# Altium PCB 555手风琴.PcbDoc
Units mil, origin at the board's own origin, x right, y up, seen from the top; angles counter-clockwise.
Board outline 9000 x 4000 mil, 2 copper layers (Top Layer, Bottom Layer); 47 components, 23 nets, 108 pads, 130 vias.
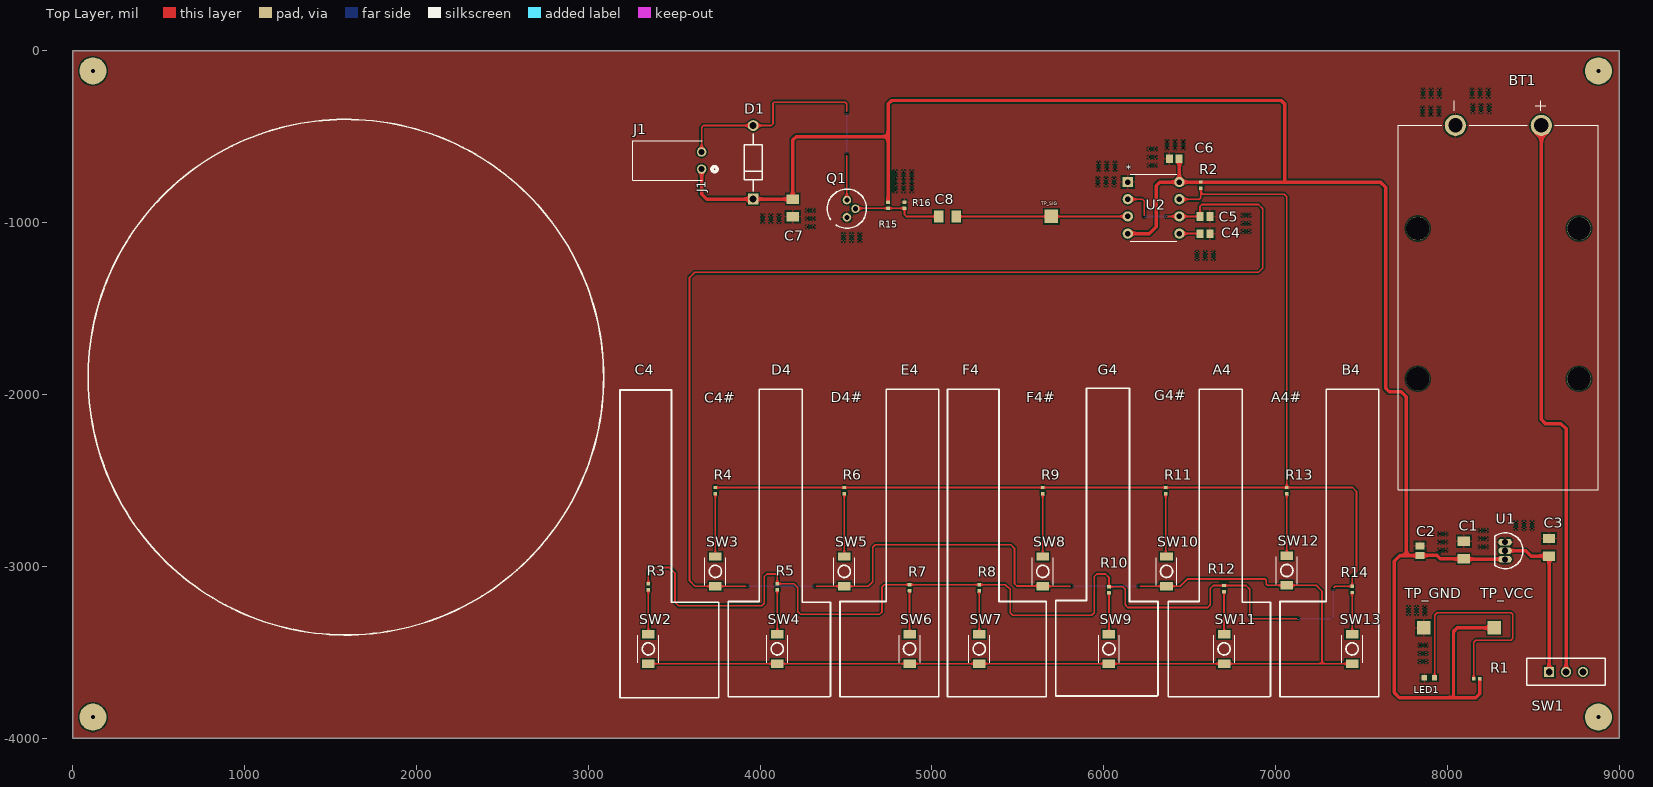
[diagram p0: Top Layer view]
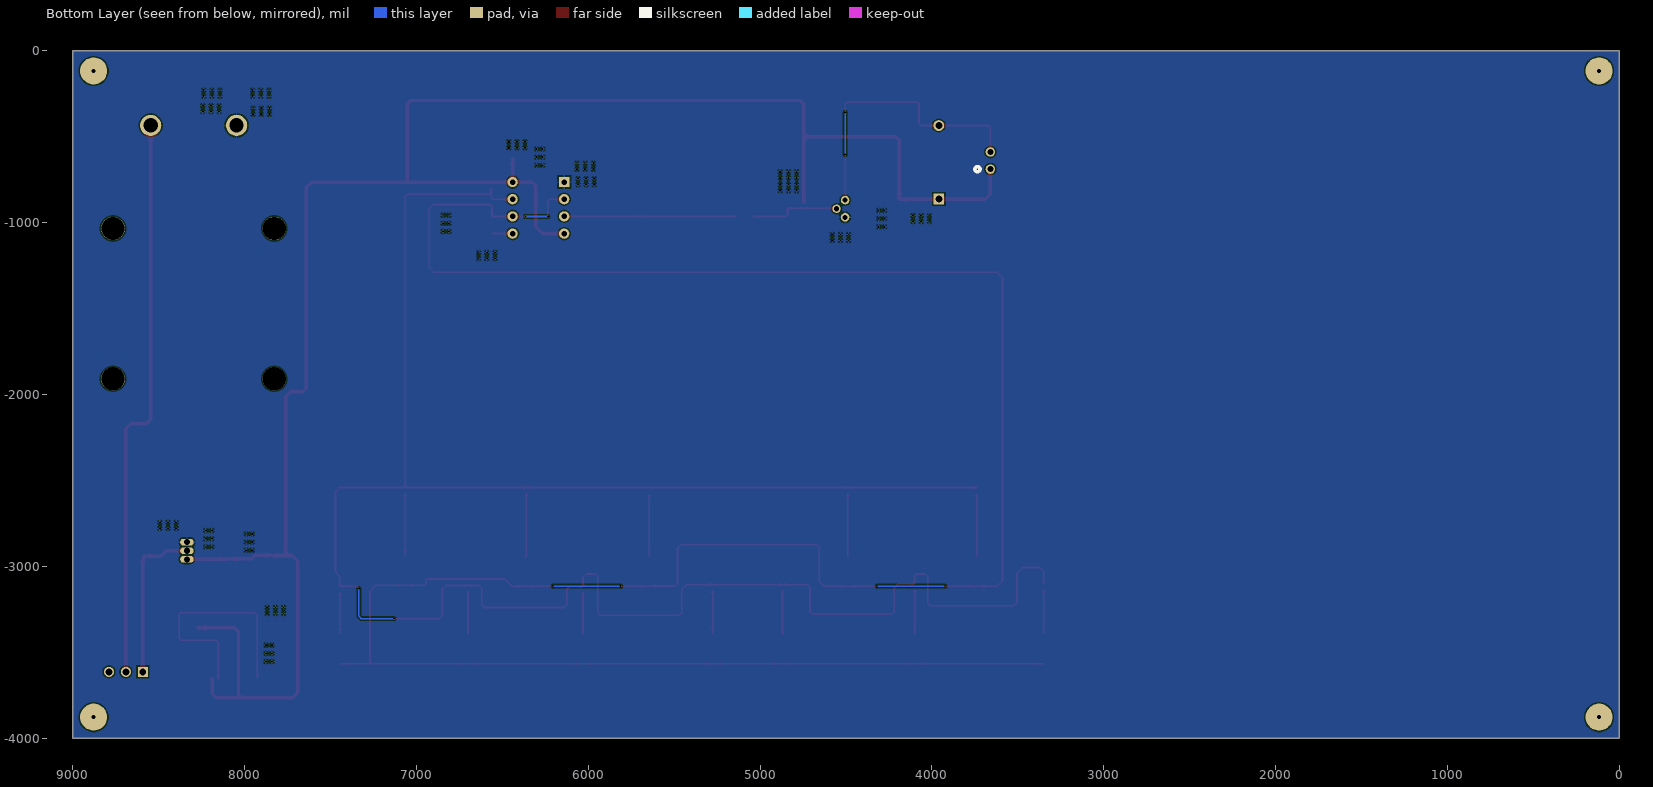
[diagram p1: Bottom Layer view, seen from below]
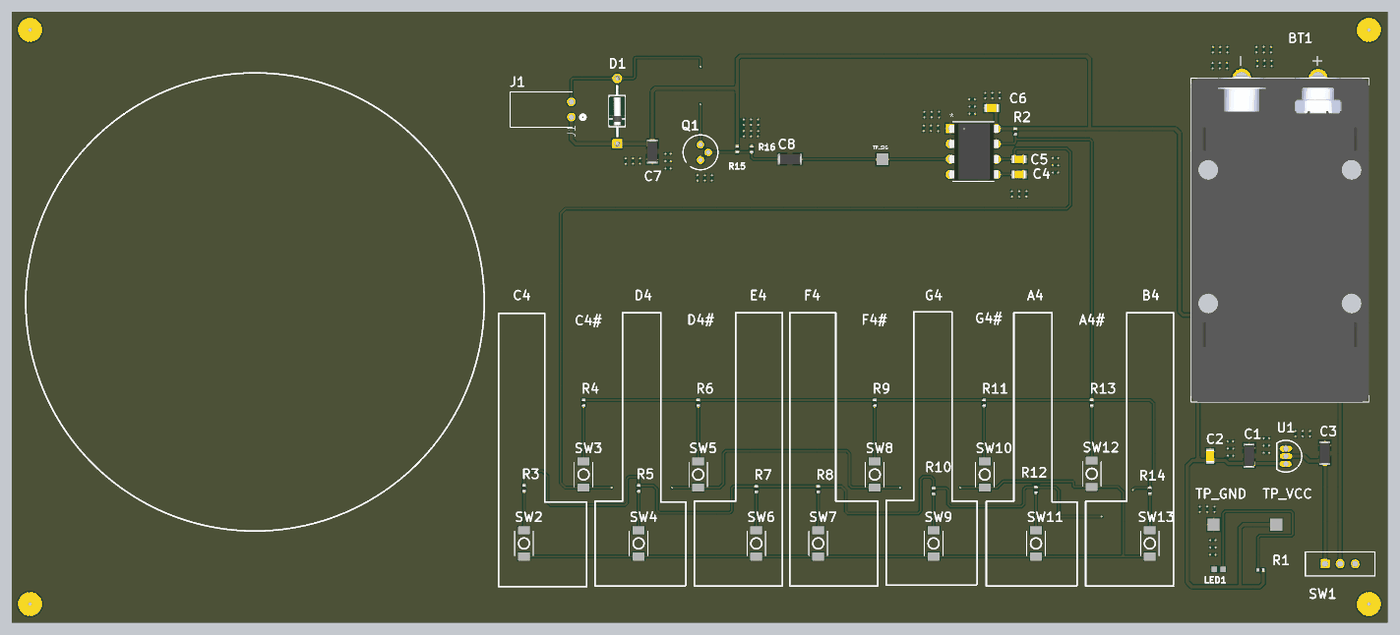
[diagram p2: 3D render of the assembled board from above, using the file's embedded part models]

## Layer stack, top to bottom
Top Solder: solder mask 0.4, Solder Resist, Dk 3.5
Top Layer: signal copper 1.4
Dielectric 1: dielectric 12.6, FR-4, Dk 4.8
Bottom Layer: signal copper 1.4
Bottom Solder: solder mask 0.4, Solder Resist, Dk 3.5

## Board outline
0,-4000 0,0 9000,0 9000,-4000

## Design rules (kind name [scope] priority, off if disabled: settings)
Clearance Via_to_Trace_Clearance [All] p1: gap=8 ignorepadtopadclearanceinfootprint=FALSE
Clearance Clearance_1 [All] p2: gap=10 ignorepadtopadclearanceinfootprint=FALSE
HoleSize [All] p1: absolutevalues=TRUE maxlimit=150 minlimit=2 maxpercent=80.000 minpercent=20.000
MinimumSolderMaskSliver [All] p1: minsoldermaskwidth=8
PolygonConnect [All] p1: connectstyle=Relief reliefconductorwidth=10 reliefentries=4 polygonreliefangle="90 Angle" airgapwidth=10
RoutingVias Signal_Via [All] p1: holewidth=10 width=20 viastyle="Through Hole" minholewidth=10 minwidth=20 maxholewidth=10 maxwidth=20
RoutingVias Power_Via [All] p2: holewidth=16 width=32 viastyle="Through Hole" minholewidth=16 minwidth=32 maxholewidth=16 maxwidth=32
RoutingVias [All] p3: holewidth=28 width=50 viastyle="Through Hole" minholewidth=28 minwidth=50 maxholewidth=28 maxwidth=50
SilkToSilkClearance [All] p1: silktosilkclearance=8
SilkToSolderMaskClearance [IsPad] p1: minsilkscreentomaskgap=5 clearancetoexposedcopper=TRUE
SolderMaskExpansion [All] p1: expansion=2 istentingtop=FALSE soldermaskfromhole=TRUE
SupplyNets "Schematic Supply Nets_3" [InNet('GND')] p1: voltage=0.000
SupplyNets "Schematic Supply Nets_2" [InNet('VCC')] p2: voltage=0.000
SupplyNets "Schematic Supply Nets_1" [InNet('VBAT')] p3: voltage=0.000
SupplyNets "Schematic Supply Nets" [InNet('VBAT_SW')] p4: voltage=0.000
Width [All] p1: maxlimit=20 minlimit=10 preferedwidth=10
26 further rules are at their usual default settings.

## Components (designator, comment, footprint, x,y, rotation, side; value= is the part's Value field where it differs from the comment)
BT1 "1294" BAT_1294 8295.91,-1494.84 r270 top
C1 "TAJA106K016RNJ" CAPMP3217X18-T_V 8095,-2906.18 r90 top value=10µF
C2 "Capacitor 100 nF +/-10% 50 V 0805" CAPC2013X95X50LL10T25 7840,-2910 r90 top value=0.01uF
C3 "TAJA106K016RNJ" CAPMP3217X18-T_V 8590,-2890 r90 top value=22-100µF
C4 "Capacitor 100 nF +/-10% 50 V 0805" CAPC2013X95X50LL10T25 6588.54,-1065 r0 top value=0.01uF
C5 "Capacitor 100 nF +/-10% 50 V 0805" CAPC2013X95X50LL10T25 6588.54,-965 r0 top value=0.01uF
C6 "Capacitor 100 nF +/-10% 50 V 0805" CAPC2013X95X50LL10T25 6410,-629.59 r180 top value=0.01uF
C7 "TAJA106K016RNJ" CAPMP3217X18-T_V 4190,-914.59 r270 top value=100-220µF
C8 "TAJA106K016RNJ" CAPMP3217X18-T_V 5090,-965 r180 top value=100µF
D1 "1N4001-E3/73" FP-1N4001-E3-73-MFG 3960,-650 r90 top value=15pF
J1 "TSW-102-22-L-S-RA" CON2_1X2_TR_TSW_SAI 3660,-639.59 r90 top
LED1 "FC-DA1608HRK-620D" LED0603-RD_RED 7895,-3650 r0 top
Q1 "2N2222A" STM-TO-18-3 4505,-920 r90 top
R1 "100R2F" RESC0402(1005)_L 8170,-3655 r180 top value=330
R2 "100R2F" RESC0402(1005)_L 6565,-782.28 r270 top value=1.4k
R3 "100R2F" RESC0402(1005)_L 3350,-3120 r270 top value=27.0k
R4 "100R2F" RESC0402(1005)_L 3740,-2560 r270 top value=25.5k
R5 "100R2F" RESC0402(1005)_L 4100,-3120 r270 top value=24.0k
R6 "100R2F" RESC0402(1005)_L 4490,-2560 r270 top value=22.1k
R7 "100R2F" RESC0402(1005)_L 4870,-3125 r270 top value=21.0k
R8 "100R2F" RESC0402(1005)_L 5275,-3125 r270 top value=20.0k
R9 "100R2F" RESC0402(1005)_L 5645,-2560 r270 top value=18.7k
R10 "100R2F" RESC0402(1005)_L 6030,-3137.28 r270 top value=17.8k
R11 "100R2F" RESC0402(1005)_L 6360,-2560 r270 top value=16.5k
R12 "100R2F" RESC0402(1005)_L 6700,-3130 r270 top value=16.0k
R13 "100R2F" RESC0402(1005)_L 7065,-2560 r270 top value=15.0k
R14 "100R2F" RESC0402(1005)_L 7445,-3135 r270 top value=14.0k
R15 "100R2F" RESC0402(1005)_L 4745,-899.59 r270 top value=10k
R16 "100R2F" RESC0402(1005)_L 4840,-899.59 r90 top value=1k
SW1 "EG1218" ESWI-EG1218_V 8690,-3615 r0 top
SW2 "TS-1088-AR02016" SW-SMD_L3.9-W3.0-P4.45 3350,-3481.02 r270 top
SW3 "TS-1088-AR02016" SW-SMD_L3.9-W3.0-P4.45 3740,-3030 r270 top
SW4 "TS-1088-AR02016" SW-SMD_L3.9-W3.0-P4.45 4100,-3481.02 r270 top
SW5 "TS-1088-AR02016" SW-SMD_L3.9-W3.0-P4.45 4490,-3030 r270 top
SW6 "TS-1088-AR02016" SW-SMD_L3.9-W3.0-P4.45 4870,-3481.02 r270 top
SW7 "TS-1088-AR02016" SW-SMD_L3.9-W3.0-P4.45 5275,-3481.02 r270 top
SW8 "TS-1088-AR02016" SW-SMD_L3.9-W3.0-P4.45 5645,-3030 r270 top
SW9 "TS-1088-AR02016" SW-SMD_L3.9-W3.0-P4.45 6030,-3481.02 r270 top
SW10 "TS-1088-AR02016" SW-SMD_L3.9-W3.0-P4.45 6365,-3030 r270 top
SW11 "TS-1088-AR02016" SW-SMD_L3.9-W3.0-P4.45 6700,-3481.02 r270 top
SW12 "TS-1088-AR02016" SW-SMD_L3.9-W3.0-P4.45 7065,-3025 r270 top
SW13 "TS-1088-AR02016" SW-SMD_L3.9-W3.0-P4.45 7445,-3481.02 r270 top
TP_GND "Component_1" PCBComponent_1 7895,-3295 r90 top
TP_SIG "Component_1" PCBComponent_1 5727.93,-901.41 r90 top
TP_VCC "Component_1" PCBComponent_1 8305,-3295 r90 top
U1 "MCP1702-5002E/TO" TO-92-TO3 8335,-2910 r180 top
U2 "LMC555CN/NOPB" N08E_TEX 6140,-764.59 r0 top

## Footprints (in the part's own frame and the unit in brackets; to place one, negate y for a bottom-side part, rotate by r counter-clockwise, add the part's x,y. Pads: shape width x height; smd on the part's side, far side on the other; paste and mask are expansions set on the pad)
BAT_1294 [mm]
  round 3.126 hole 2.11: N(-26.925,-6.35) P(-26.925,6.35)
  round 3.45 hole 3.45 unplated: ""(-11.685,11.915) ""(-11.685,-11.915) ""(10.545,11.915) ""(10.545,-11.915)
  silkscreen extent -30.56,-14.78 26.93,14.78, body extent -27.23,-14.78 26.92,14.78, height 20.32
CAPC2013X95X50LL10T25 [mm] "Chip Capacitor, 2-Leads, Body 2.10x1.35mm, IPC High Density"
  rect 1.05x1.3 smd: 1(-0.725,0) 2(0.725,0)
  body extent -1.05,-0.67 1.05,0.67, height 0.95
CAPMP3217X18-T_V [mm] "Molded Capacitor, 2-Leads, Body 3.40x1.8mm"
  rect 1.4x1.8 smd: 1(-1.3,0) 2(1.3,0)
  body extent -1.92,-0.9 1.92,0.9, height 1.8
CON2_1X2_TR_TSW_SAI [mil]
  round 55 hole 35 paste-99999 mask+0: 1(-50,0) 2(50,0)
  silkscreen extent -115,-90 115,400
ESWI-EG1218_V [mm] "THD, 3-Leads, Body 11.6x4mm, Pitch 2.5mm"
  rect 1.5x1.5 hole 1: 1(-2.5,0)
  round 1.5 hole 1: 2(0,0) 3(2.5,0)
  silkscreen extent -5.8,-2 5.8,2, body extent -5.8,-2 5.8,2, height 7.4
FP-1N4001-E3-73-MFG [mm]
  rect 1.6x1.6 hole 1.05 paste-2539.97 mask+0: 1(-5.438,0)
  round 1.6 hole 1.05 paste-2539.97 mask+0: 2(5.438,0)
  silkscreen extent -4.24,-1.35 4.24,1.35, body extent -6.34,-1.45 6.34,1.45, height 0.25
LED0603-RD_RED [mm]
  rect 0.8x0.8 smd paste+0.051: 1(-0.749,-0.003) 2(0.749,0.003)
N08E_TEX [mil]
  rect 60x60 / inner round 60 / far side rect 60x60 hole 32 paste-99999 mask+0: 1(0,0)
  round 60 hole 32 paste-99999 mask+0: 2(0,-100) 3(0,-200) 4(0,-300) 5(300,-300) 6(300,-200) 7(300,-100) 8(300,0)
  silkscreen extent 15,-345 285,45, body extent -5,-340 315,40, height 215
PCBComponent_1 [mm]
  rect 2x2 smd: 1(-1.615,0.836)
RESC0402(1005)_L [mm] "Chip Resistor, Body 1.0x0.5mm, IPC High Density"
  rrect25% 0.5x0.55 smd: 1(-0.45,0) 2(0.45,0)
  body extent -0.5,-0.25 0.5,0.25, height 0.3
STM-TO-18-3 [mm] "TO, 3-Leads, Diameter 5.8mm"
  round 1.25 hole 0.75: 1(0,-1.27) 2(1.27,0) 3(-1.27,0)
  silkscreen extent -2.9,-2.9 2.9,2.9, body extent -3.23,-2.9 2.9,3.23, height 5.3
SW-SMD_L3.9-W3.0-P4.45 [mm]
  rect 1.23x1.86 smd paste+0.051: 1(-2.185,0) 2(2.185,0)
  silkscreen extent -2.03,-1.54 2.03,1.54
TO-92-TO3 [mm] "TO, Flat Index; 3 In-Line, Axial Leads; Body Dia. 4.8mm; Leads 0.56 x 0.53 mm (max)"
  oval 2x1 hole 0.9: 1(0,-1.27) 2(0,0) 3(0,1.27)
  silkscreen extent -2.65,-2.65 1.52,2.65, body extent -2.65,-2.66 1.52,2.66, height 5.33

## Part data
BT1: "9 Volt Battery Holder- PC Terminals", Package="NON STANDARD-6 Keystone", Check_prices=https://www.snapeda.com/parts/1294/Keystone/view-part/?ref=eda, MF="Keystone Electronics", MP=1294, SnapEDA_Link=https://www.snapeda.com/parts/1294/Keystone/view-part/?ref=snap
C1 C3 C7 C8: library part CMP-001-00041-7, "Standard Tantalum, 10 uF, +/- 10%, 16 V, -55 to 125 degC, 1206 (3216 Metric), RoHS, Tape and Reel", Capacitor Type=Tantalum, Case/Package=1206, Manufacturer=AVX, Max Operating Temperature=125°C, Min Operating Temperature=-55°C, Package Description="2-Pin Surface Mount Device, Body 3.2 x 1.65 mm", Package Quantity=1, Package Reference=CAPMP3217X18-T, Tolerance=10%, Voltage Rating=16V, Datasheet URL=http://datasheets.avx.com/TAJ.pdf, Datasheet Version=Feb-16, ESR=3Ohm, Manufacturer URL=http://www.avx.com/, Mounting Technology=SM, Package URL=http://www.avx.com/download/software/literature/AVX-Footprint-Library.pdf, Packaging=TapeandReel, Pins=2, RoHS Compliant=True
C2 C4 C5 C6: library part CMP-001-00018-6, "Chip Capacitor, 100 nF, +/- 10%, 50 V, 0805 (2012 Metric)", Capacitor Type=Ceramic, Case/Package=0805, Max Operating Temperature=125°C, Min Operating Temperature=-55°C, Tolerance=10%, Voltage Rating=50V, Mounting Technology=SM, Pins=2, RoHS Compliant=True
D1: library part CMP-02540-000001-1, "DIODE GEN PURP 50V 1A DO204AL", Capacitance=15pF, Forward Current=1A, Manufacturer=Vishay, Max Junction Temp=+150°C, Max Repetitive Reverse Voltage=50V, Max Surge Forward Current=30A, Peak Reverse Current=5uA, Temperature="-50°C to +150°C", Temperature Range Low=-50°C, Automotive=No, Category=Diode, ComponentLink2Description=Datasheet, ComponentLink2URL=http://www.vishay.com/docs/88503/1n4001.pdf, Device Class L1="Discrete Semiconductors", Device Class L2=Diodes, Device Class L3="Rectifier Diodes", Digikey Description="DIODE GEN PURP 50V 1A DO204AL", Height=2.7mm, Ipc Land Pattern Name=DIOPA1088W105L520D270, Lead Free=Yes, Manufacturer Part Number=1N4001-E3/73, Mouser Description="Rectifiers Vr/50V Io/1A", Octopart=https://octopart.com/1n4001-e3%2F73-vishay-42330130, Package=1N4001-E3/73, Reverse Voltage=50V, RoHS=TRUE, Temperature Range High=+150°C
J1: "No Description Available", Manufacturer_Name="Samtec Inc", Copyright="Copyright (C) 2026 Ultra Librarian. All rights reserved.", Manufacturer_Part_Number=TSW-102-22-L-S-RA, RefDes=RefDes, Type=Type
Q1: library part CMP-2000-05381-1, "High Speed Switch, 0.6 A IC, -65 to 175 degC, 3-Pin TO-18, RoHS, Bulk", Collector Emitter Voltage V(br)ceo=40V, DC Collector Current=600mA, DC Current Gain hFE=300hFE, Manufacturer=STMicroelectronics, Operating Temperature Max=175degC, Package Description="3-Pin Through Hole Device, Dia 5.8 mm, Pitch 1.27 mm", Package Reference=TO-18-3, Power Dissipation Pd=500mW, Transistor Case Style=TO-18, Transition Frequency ft=300MHz, Automotive Qualification Standard=-, Datasheet URL=https://datasheet.ciiva.com/25917/cd00003223-25917094.pdf, Datasheet Version=Feb-03, Manufacturer URL=http://www.st.com/, No. of Pins=3Pins, Product Range=-, Transistor Polarity=NPN
R1 R2 R3 R4 R5 R6 R7 R8 R9 R10 R11 R12 R13 R14 R15 R16: library part CMP-009-00065-2, "100R 0.063W 1% 0402 (1005 Metric)  SMD", Case/Package=0402, Power=63mW, Tolerance=1%, Mounting Technology=SMT, Pins=2
SW1: library part CMP-1696-00002-1, "Slide Switch, 500 V, -20 to 70 degC, 3-Pin THD, RoHS", Case\Package=SOT-23-5, Dropout Voltage="300 mV", Max Input Voltage="8 V", Max Operating Temperature="85 degC", Max Ouput Current="150 mA", Max Power Dissipation="250 mW", Min Input Voltage="4.3 V", Min Operating Temperature="-40 degC", Nominal Output Voltage="3.3 V", Package Quantity=3000, ComponentLink1Description="Manufacturer URL", ComponentLink1URL=http://www.e-switch.ch/en/, ComponentLink2Description=Datasheet, ComponentLink2URL=https://www.e-switch.com/system/asset/product_line/data_sheet/119/EG.pdf, DatasheetVersion=Oct-15, Height="1.3 mm", Length="3 mm", Mount="Surface Mount", Output Current="150 mA", Output Voltage="3.3 V", Outputs=1, PackageDescription="3-Pin Through Hole Device, Body 11.6 x 4 mm, Pitch 2.5 mm", PackageReference=EG1218, Packaging="Tape and Reel", Pins=5, Power Rating="250 mW", Radiation Hardening=No, REACH SVHC="No SVHC", RoHSCompliant=true, Width="1.8 mm"
U1: library part CMP-0136-00022-1, "250 mA Low Quiescent Current LDO Regulator, 3-Pin TO-92, Extended TemperatureBAG", DatasheetVersion="revD, Jun-2009", PackageDescription="3-Lead Plastic Transistor Outline (TO) [TO-92]", PackageReference=TO-92-TO3, PackageVersion="revBB, Aug-2009"
U2: library part LMC555CNNOPB, "Worldâ€™s smallest 555 timer with low power, high accuracy and a Fmax of 3MHz 8-PDIP -40 to 85", Manufacturer_Name="Texas Instruments", Copyright="Copyright (C) 2025 Ultra Librarian. All rights reserved.", Manufacturer_Part_Number=LMC555CN/NOPB, RefDes=RefDes, Type=Type
LED1: Symbol=FC-DA1608HRK-620D
SW2 SW3 SW4 SW5 SW6 SW7 SW8 SW9 SW10 SW11 SW12 SW13: Symbol=TS-1088-AR02016

## Free pads (board coordinates)
  round 157.48 hole 23.62: 13(118.11,-118.11) 14(118.11,-3877.95) 15(8877.95,-118.11) 16(8877.95,-3877.95)

## Via types
v1: diameter 10/10 (per signal layer), hole 12, Top Layer to Bottom Layer, 130 vias

## Nets (pads, with @x,y where several pads share a name; then routed paths per layer and width w, separated by ;. In a path a pad name is that pad's centre, name@x,y a point inside that pad or via, vN(x,y) a via of type N, cw(c..) or ccw(c..) an arc to the next point about the centre after c; other vN are vias at no path point)
GND: BT1.N C1.2 C2.2 C3.2 C4.2 C5.2 C6.2 C7.2 LED1.1 Q1.3 R16.2 TP_GND.1 U1.1 U2.1
  other v1: 7840,-3555 7875,-3555 7840,-3507.5 7875,-3507.5 7840,-3460 7875,-3460 7772.5,-3275 7820,-3275 7867.5,-3275 7772.5,-3240 7820,-3240 7867.5,-3240 7955,-2907.5 7990,-2907.5 8190,-2887.5 8225,-2887.5 7955,-2860 7990,-2860 8190,-2840 8225,-2840 7955,-2812.5 7990,-2812.5 8190,-2792.5 8225,-2792.5 8397.5,-2780 8445,-2780 8492.5,-2780 8397.5,-2745 8445,-2745 8492.5,-2745 6542.5,-1210 6590,-1210 6637.5,-1210 6542.5,-1175 6590,-1175 6637.5,-1175 4485,-1105 4532.5,-1105 4580,-1105 4485,-1070 4532.5,-1070 4580,-1070 6810,-1052.5 6845,-1052.5 4275,-1025 4310,-1025 6810,-1005 6845,-1005 4015,-995 4062.5,-995 4110,-995 4275,-977.5 4310,-977.5 4015,-960 4062.5,-960 4110,-960 6810,-957.5 6845,-957.5 4275,-930 4310,-930 4787.5,-815 4835,-815 4882.5,-815 4787.5,-780 4835,-780 4882.5,-780 5965,-780 6012.5,-780 6060,-780 5965,-745 6012.5,-745 6060,-745 4787.5,-740 4835,-740 4882.5,-740 4787.5,-705 4835,-705 4882.5,-705 5970,-690 6017.5,-690 6065,-690 6265,-667.5 6300,-667.5 5970,-655 6017.5,-655 6065,-655 6265,-620 6300,-620 6265,-572.5 6300,-572.5 6367.5,-565 6415,-565 6462.5,-565 6367.5,-530 6415,-530 6462.5,-530 7855,-370 7902.5,-370 7950,-370 8147.5,-355 8195,-355 8242.5,-355 7855,-335 7902.5,-335 7950,-335 8147.5,-320 8195,-320 8242.5,-320 7857.5,-265 7905,-265 7952.5,-265 8142.5,-265 8190,-265 8237.5,-265 7857.5,-230 7905,-230 7952.5,-230 8142.5,-230 8190,-230 8237.5,-230
NetC4_1: C4.1 U2.5 | length 120.2
  Top Layer w10: U2.5 6559.59,-1064.59 C4.1
NetC5_1: C5.1 SW2.2 SW3.2 SW4.2 SW5.2 SW6.2 SW7.2 SW8.2 SW9.2 SW10.2 SW11.2 SW12.2 SW13.2 U2.2 U2.6 | length 15127.6
  Top Layer w10: SW2.2 SW4.2 SW6.2 SW7.2 SW9.2 SW11.2 7270,-3567.04 ; v1(3923.98,-3116.02) SW3.2 3621.02,-3116.02 3590,-3085 3590,-1320 3620,-1290 6900,-1290 6925,-1265 6925,-920 6900,-895 6570,-895 6560,-905 6560,-964.19 6559.59,-964.59 U2.6 6439.8,-964.8 6365.2,-964.8 v1(6365,-965) ; v1(4318.98,-3116.02) SW5.2 4628.98,-3116.02 4655,-3090 4655,-2890 4670,-2875 5460,-2875 5480,-2895 5480,-3100 5495,-3115 5643.98,-3115 SW8.2 v1(5811.02,-3116.02) ; U2.2 6224.59,-864.59 6235,-875 v1(6235,-965) ; v1(6203.98,-3116.02) SW10.2 6443.98,-3116.02 6485,-3075 6939.14,-3075 6945,-3080.86 6945,-3105.16 6950.86,-3111.02 SW12.2 7236.02,-3111.02 7270,-3145 7270,-3567.04 ; SW13.2 7270,-3567.04
  Bottom Layer w10: v1(3923.98,-3116.02) v1(4318.98,-3116.02) ; v1(5811.02,-3116.02) v1(6203.98,-3116.02) ; v1(6235,-965) v1@6364.46,-965
NetC8_2: C8.2 Q1.1 R15.2 R16.1 | length 526.8
  Top Layer w10: Q1.1 4557.69,-917.31 R16.1 4840,-955 4850,-965 C8.2
NetD1_2: D1.2 J1.2 Q1.2 | length 1683.6
  Top Layer w10: J1.2 3660,-445 3669.09,-435.91 D1.2 4064.09,-435.91 4075,-425 4075,-305.86 4080.86,-300 4495,-300 4505,-310 v1(4505,-360) ; Q1.2 v1(4505,-605)
  Bottom Layer w10: v1(4505,-605) v1(4505,-360)
NetLED1_2: LED1.2 R1.2 | length 1419.8
  Top Layer w10: LED1.2 7925,-3649.35 7925,-3285 7940,-3270 8370,-3270 8380,-3280 8380,-3420 8370,-3430 8165,-3430 8152.28,-3442.72 R1.2
NetR2_2: R2.2 R3.1 R4.1 R5.1 R6.1 R7.1 R8.1 R9.1 R10.1 R11.1 R12.1 R13.1 R14.1 U2.7 | length 12572.5
  Top Layer w10: R3.1 3350,-3030 3372.07,-3007.93 3472.93,-3007.93 3505,-3040 3505,-3210 3525,-3230 4010,-3230 4025,-3215 4025,-3060 4040,-3045 4090,-3045 4100,-3055 R5.1 4197.28,-3102.28 4220,-3125 4220,-3265 4235,-3280 4695,-3280 4710,-3265 4710,-3120 4722.72,-3107.28 R8.1 5427.28,-3107.28 5455,-3135 5455,-3270 5470,-3285 5930,-3285 5945,-3270 5945,-3060 5960,-3045 6010,-3045 6029.84,-3064.84 R10.1@6029.84,-3119.57 ; R4.1 R6.1 5639.02,-2542.28 R9.1@5642.01,-2539.29 ; R9.1 6354.02,-2542.28 R11.1@6357.01,-2539.29 ; R10.1 6109.57,-3119.57 6125,-3135 6125,-3225 6140,-3240 6605,-3240 6620,-3225 6620,-3130 6637.72,-3112.28 R12.1 6827.28,-3112.28 6850,-3135 6850,-3290 6865,-3305 v1(7130,-3305) ; R11.1 7059.02,-2542.28 R13.1@7062.01,-2539.29 ; U2.7 6555.41,-864.59 6565,-855 6565,-827.5 ; R2.2 6565,-827.5 ; v1(7335,-3130) 7347.72,-3117.28 R14.1 7445,-3060 7470,-3035 7470,-2940 7470,-2565 7447.28,-2542.28 R13.1 7065,-850 7050,-835 6572.5,-835 6565,-827.5
  Bottom Layer w10: v1(7130,-3305) 7320,-3305 7335,-3290 v1(7335,-3130)
NetR3_2: R3.2 SW2.1 | length 257.3
  Top Layer w10: SW2.1 R3.2
NetR4_2: R4.2 SW3.1 | length 366.3
  Top Layer w10: SW3.1 R4.2
NetR5_2: R5.2 SW4.1 | length 257.3
  Top Layer w10: SW4.1 R5.2
NetR6_2: R6.2 SW5.1 | length 371.3
  Top Layer w10: SW5.1 R6.2@4490,-2572.72
NetR7_2: R7.2 SW6.1 | length 254.6
  Top Layer w10: SW6.1 R7.2@4870,-3140.43
NetR8_2: R8.2 SW7.1 | length 252.3
  Top Layer w10: SW7.1 R8.2
NetR9_2: R9.2 SW8.1 | length 359
  Top Layer w10: SW8.1 R9.2@5645,-2585
NetR10_2: R10.2 SW9.1 | length 240
  Top Layer w10: SW9.1 R10.2
NetR11_2: R11.2 SW10.1 | length 373.3
  Top Layer w10: R11.2@6360,-2572.72 6360,-2938.98 SW10.1
NetR12_2: R12.2 SW11.1 | length 247.3
  Top Layer w10: SW11.1 R12.2
NetR13_2: R13.2 SW12.1 | length 366.3
  Top Layer w10: SW12.1 R13.2@7065,-2572.72
NetR14_2: R14.2 SW13.1 | length 242.3
  Top Layer w10: SW13.1 R14.2
out: C8.1 TP_SIG.1 U2.3 | length 999
  Top Layer w10: C8.1 TP_SIG.1 5695.41,-964.59 U2.3
VBAT: BT1.P SW1.2 | length 3292.6
  Top Layer w20: BT1.P 8545.91,-2145.91 8570,-2170 8660,-2170 8690,-2200 SW1.2
VBAT_SW: C3.1 SW1.1 U1.2 | length 936.5
  Top Layer w20: U1.2 8455,-2910 8486.18,-2941.18 C3.1 ; C3.1@8580,-2951.18 8591.57,-2962.76 SW1.1
VCC: C1.1 C2.1 C6.1 C7.1 D1.1 J1.1 R1.1 R2.1 R15.1 TP_VCC.1 U1.3 U2.4 U2.8 | length 11758.6
  Top Layer w20: J1.1 3660,-835 3689.09,-864.09 C7.1@4189.32,-864.09 ; C7.1 4190,-520 4210,-500 4745,-500 ; R15.1 4745,-500 ; U2.4 6265.41,-1064.59 6305,-1025 6305,-785 6325.41,-764.59 U2.8 ; C6.1 6439.27,-630.32 6439.27,-763.87 U2.8 ; R2.1 U2.8 ; R2.1 7050,-764.57 ; C2.1 7760,-2938.54 ; C2.1@7845,-2937.09 7937.09,-2937.09 7957.36,-2957.36 C1.1 8096.32,-2958.68 8333.68,-2958.68 U1.3 ; R1.1 8187.72,-3742.28 8165,-3765 8030,-3765 ; TP_VCC.1 8056.41,-3358.59 8035,-3380 8035,-3760 8030,-3765 ; 4745,-500 4745,-310 4765,-290 7031.51,-290 7051.83,-310.31 7051.83,-762.74 7050,-764.57 ; 7050,-764.57 7609.57,-764.57 7640,-795 7640,-1965 7660,-1985 7730,-1985 7760,-2015 7760,-2938.54 ; 7760,-2938.54 7721.46,-2938.54 7690,-2970 7690,-3735 7720,-3765 8030,-3765
pads on no net: BT1. SW1.3

## Polygon pours and split planes (outlines as drawn)
GND on Top Layer "NONET_L-01_P-001" (solid, pour order 0): 0,0 9000,0 9000,-4000 0,-4000
GND on Bottom Layer "NONET_L-01_P-001" (solid, pour order 1): 0,0 9000,0 9000,-4000 0,-4000

## Silkscreen, mask and mechanical layers (free items; w line width, h text height)
Top Overlay:
  circle w10: c1590,-1900 r1500
  lines w10: 4405,-3760 3815,-3760 3815,-3205 3995,-3205 3995,-1970 4245,-1970 4245,-3210 4410,-3210 4410,-3755 ; 6310,-3755 5720,-3755 5720,-3200 5900,-3200 5900,-1965 6150,-1965 6150,-3205 6315,-3205 6315,-3750 ; 6965,-3760 6375,-3760 6375,-3205 6555,-3205 6555,-1970 6805,-1970 6805,-3210 6970,-3210 6970,-3755 ; 3185,-3765 3760,-3765 3760,-3210 3485,-3210 3485,-1975 3185,-1975 3185,-3765 ; 4465,-3760 5040,-3760 5040,-1970 4735,-1970 4735,-3205 4465,-3205 4465,-3760 ; 5090,-3760 5665,-3760 5665,-3205 5390,-3205 5390,-1970 5090,-1970 5090,-3760 ; 7025,-3760 7025,-3205 7295,-3205 7295,-1970 7600,-1970 7600,-3760 7025,-3760
  text "C4" at 3270,-1885 h60
  text "D4" at 4065,-1885 h60
  text "E4" at 4820,-1885 h60
  text "F4" at 5175,-1885 h60
  text "G4" at 5965,-1885 h60
  text "A4" at 6635,-1885 h60
  text "B4" at 7385,-1885 h60
  text "G4#" at 6295,-2035 h60
  text "D4#" at 4410,-2045 h60
  text "F4#" at 5550,-2045 h60
  text "A4#" at 6975,-2045 h60
  text "C4#" at 3675,-2050 h60
Mechanical 1:
  the board outline again, w10

## Text inside footprints (layer, text, board x,y; h text height)
U2: Top Overlay "*" at 6127.5,-715.42 h50; Mechanical 13 "*" at 6157.5,-789.59 h50